# Altium PCB MainBoard2.PcbDoc
Units mil, origin at the board's own origin, x right, y up, seen from the top; angles counter-clockwise.
Board outline 3149.61 x 2351.58 mil, 2 copper layers (Top Layer, Bottom Layer); 16 components, 23 nets, 192 pads, 0 vias.
Unrouted connection lines stored in the file: 73.
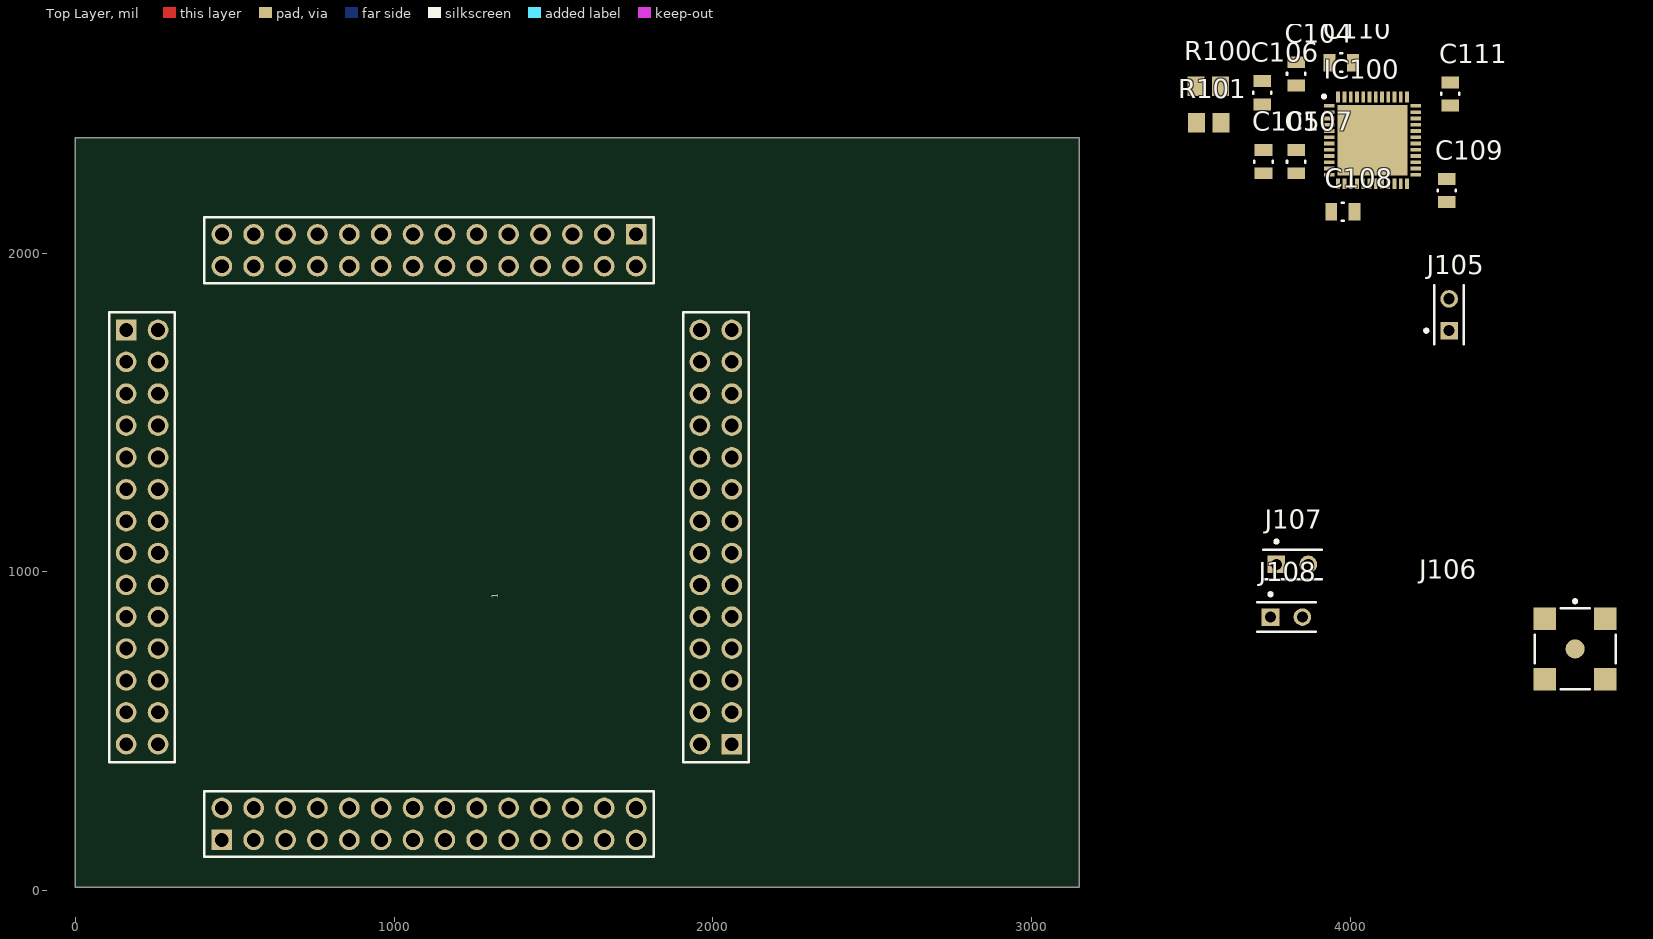
[diagram p0: Top Layer view]
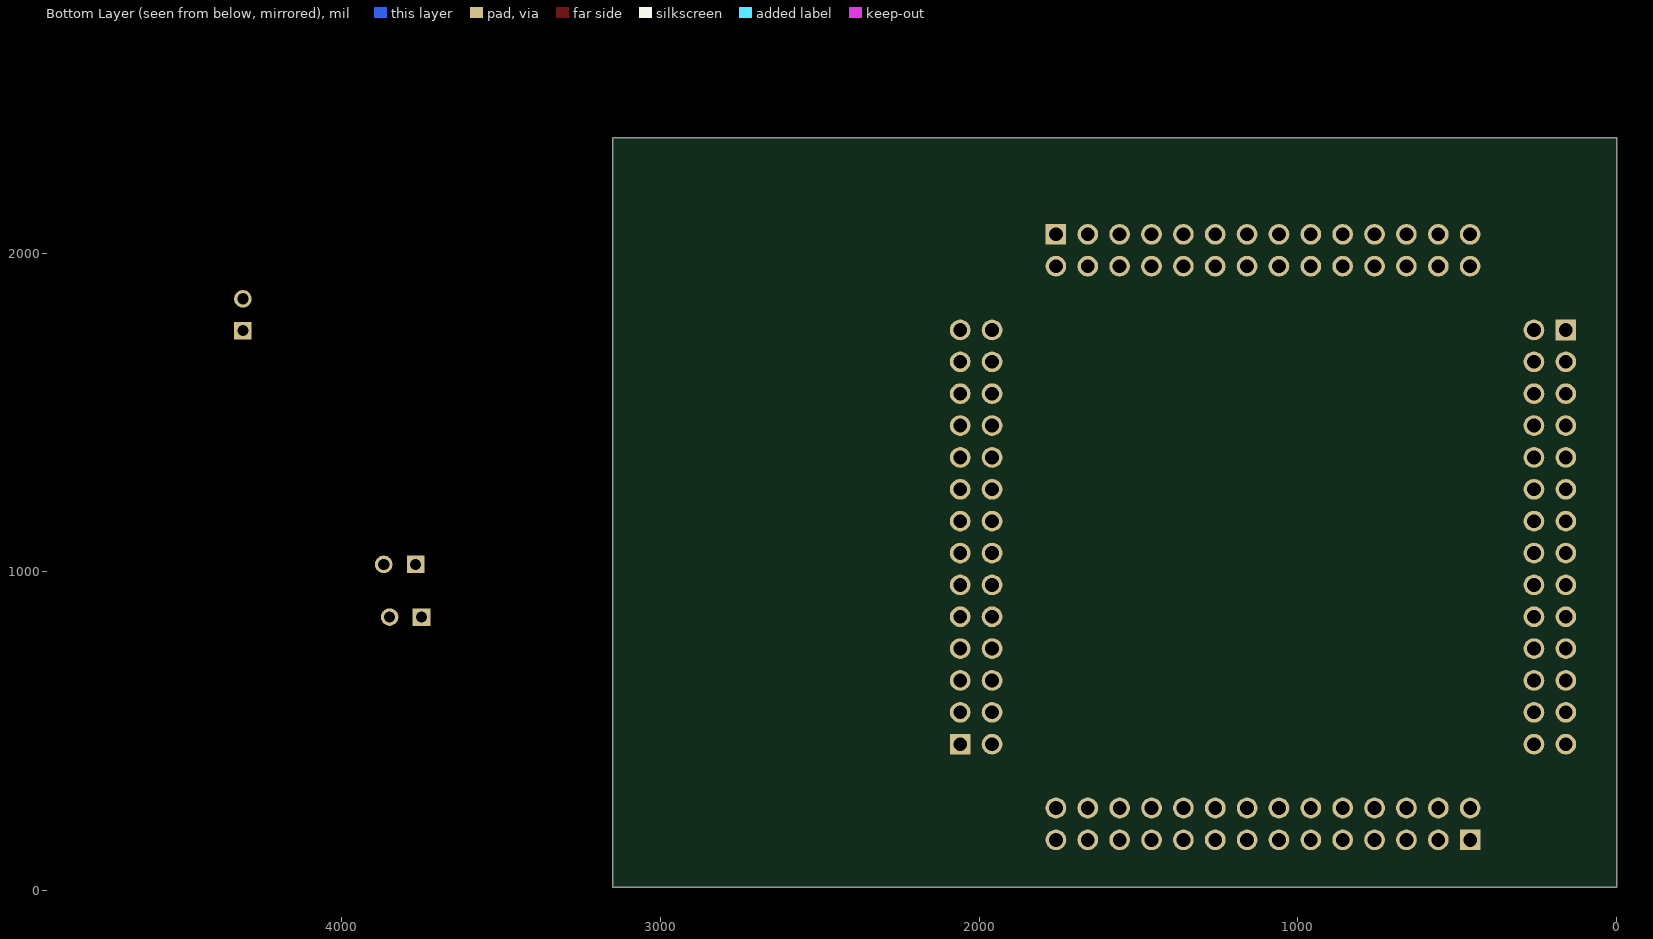
[diagram p1: Bottom Layer view, seen from below]

## Layer stack, top to bottom
Top Solder: solder mask 0.4, Solder Resist, Dk 3.5
Top Layer: signal copper 1.4
Dielectric 1: dielectric 12.6, FR-4, Dk 4.8
Bottom Layer: signal copper 1.4
Bottom Solder: solder mask 0.4, Solder Resist, Dk 3.5

## Board outline
0,10.62 3149.61,10.62 3149.61,2362.2 0,2362.2

## Design rules (kind name [scope] priority, off if disabled: settings)
Clearance [All] p1: gap=10 ignorepadtopadclearanceinfootprint=FALSE except(0: Arc-Hole Track-Hole SMDPad-Hole THPad-Hole Via-Hole Fill-Hole Poly-Hole Region-Hole Text-Hole)
PolygonConnect [All] p1: connectstyle=Relief reliefconductorwidth=10 reliefentries=4 polygonreliefangle="90 Angle" airgapwidth=10
RoomDefinition Computation [InComponentClass('Computation')] p1: confinementstyle=ConfineIn formatcopy=TRUE lockcomponents=FALSE outline 6045,-627.5 7780,-627.5 7780,1032.5 6045,1032.5
RoutingVias [All] p1: holewidth=28 width=50 viastyle="Through Hole" minholewidth=28 minwidth=50 maxholewidth=28 maxwidth=50
SolderMaskExpansion [All] p1: expansion=4 istentingtop=FALSE
Width [All] p1: maxlimit=10 minlimit=10 preferedwidth=10
30 further rules are at their usual default settings.

## Classes and differential pairs
net class BIT579: ADC_BIT_5 ADC_BIT_7 ADC_BIT_9
net class BIT468: 3V3 ADC_BIT_4 ADC_BIT_6 ADC_BIT_8 GND
net class BIT13: ADC_BIT_1 ADC_BIT_3 GND Net_17 Net_19
component class Computation: C104 C105 C106 C107 C108 C109 C110 C111 IC100 J105 J106 J107 R100 R101

## Components (designator, comment, footprint, x,y, rotation, side; value= is the part's Value field where it differs from the comment)
C104 "0.1uF" FP-CC0805-0_85-MFG 3830.71,2562.99 r270 top value="100 nF"
C105 "0.1uF" FP-CC0805-0_85-MFG 3728.35,2287.4 r270 top value="100 nF"
C106 "0.1uF" FP-CC0805-0_85-MFG 3724.41,2503.94 r270 top value="100 nF"
C107 "0.1uF" FP-CC0805-0_85-MFG 3830.71,2287.4 r270 top value="100 nF"
C108 "0.1uF" FP-CC0805-0_85-MFG 3977.36,2129.92 r0 top value="100 nF"
C109 "0.1uF" FP-CC0805-0_85-MFG 4303.15,2196.85 r270 top value="100 nF"
C110 "0.1uF" FP-CC0805-0_85-MFG 3972.44,2598.43 r180 top value="100 nF"
C111 "0.1uF" FP-CC0805-0_85-MFG 4314.96,2500 r90 top value="100 nF"
IC100 "MAX19516ETM+" QFN50P700X700X80-49N 4070.87,2354.33 r0 top
J105 "5-146280-2" TECO-5-146280-2_V 4311.02,1807.09 r90 top
J106 "73251-1350" FP-73251-1350-MFG 4706.3,758.27 r270 top
J107 "5-146280-2" TECO-5-146280-2_V 3818.9,1023.62 r0 top
J108 "5-146280-2" TECO-5-146280-2_V 3800.39,858.27 r0 top
R100 "1.5R" RESC2013X70X40ML20T20 3555.12,2523.62 r0 top
R101 "1.5R" RESC2013X70X40ML20T20 3556.1,2409.45 r0 top
? "FPGA_Shield_headers" FPGA_SHIELD_HEADER_FOOTPRINT 0,0 r0 top

## Footprints (in the part's own frame and the unit in brackets; to place one, negate y for a bottom-side part, rotate by r counter-clockwise, add the part's x,y. Pads: shape width x height; smd on the part's side, far side on the other; paste and mask are expansions set on the pad)
FP-73251-1350-MFG [mil]
  round 60 smd paste+0 mask+0: 1(0,0)
  rect 70x70 smd paste+0 mask+0: 2(-95,95) 3(95,95) 4(-95,-95) 5(95,-95)
  silkscreen extent -155,-127 127,127, body extent -134,-134 134,134, height 10
FP-CC0805-0_85-MFG [mm]
  rect 0.95x1.4 smd paste+0 mask+0: 1(-0.925,0) 2(0.925,0)
  silkscreen extent -0.08,-0.72 0.08,0.72, body extent -1.6,-1.05 1.6,1.05, height 0.25
FPGA_SHIELD_HEADER_FOOTPRINT [mm]
  rect 1.65x1.65 hole 1.1: 1(4.04,44.685) 56(44.689,52.311) 84(52.318,11.665) 85(11.666,4.04)
  round 1.65 hole 1.1: 2(6.58,44.685) 3(4.04,42.145) 4(6.58,42.145) 5(4.04,39.605) 6(6.58,39.605) 7(4.04,37.065) 8(6.58,37.065) 9(4.04,34.525) 10(6.58,34.525) 11(4.04,31.985) 12(6.58,31.985) 13(4.04,29.445) 14(6.58,29.445) 15(4.04,26.905) 16(6.58,26.905) 17(4.04,24.365) 18(6.58,24.365) 19(4.04,21.825) 20(6.58,21.825) 21(4.04,19.285) 22(6.58,19.285) 23(4.04,16.745) 24(6.58,16.745) 25(4.04,14.205) 26(6.58,14.205) 27(4.04,11.665) 28(6.58,11.665) 29(11.669,49.771) 30(11.669,52.311) 31(14.209,49.771) 32(14.209,52.311) 33(16.749,49.771) 34(16.749,52.311) 35(19.289,49.771) 36(19.289,52.311) 37(21.829,49.771) 38(21.829,52.311) 39(24.369,49.771) 40(24.369,52.311) 41(26.909,49.771) 42(26.909,52.311) 43(29.449,49.771) 44(29.449,52.311) 45(31.989,49.771) 46(31.989,52.311) 47(34.529,49.771) 48(34.529,52.311) 49(37.069,49.771) 50(37.069,52.311) 51(39.609,49.771) 52(39.609,52.311) 53(42.149,49.771) 54(42.149,52.311) 55(44.689,49.771) 57(49.778,44.685) 58(52.318,44.685) 59(49.778,42.145) 60(52.318,42.145) 61(49.778,39.605) 62(52.318,39.605) 63(49.778,37.065) 64(52.318,37.065) 65(49.778,34.525) 66(52.318,34.525) 67(49.778,31.985) 68(52.318,31.985) 69(49.778,29.445) 70(52.318,29.445) 71(49.778,26.905) 72(52.318,26.905) 73(49.778,24.365) 74(52.318,24.365) 75(49.778,21.825) 76(52.318,21.825) 77(49.778,19.285) 78(52.318,19.285) 79(49.778,16.745) 80(52.318,16.745) 81(49.778,14.205) 82(52.318,14.205) 83(49.778,11.665) 86(11.666,6.58) 87(14.206,4.04) 88(14.206,6.58) 89(16.746,4.04) 90(16.746,6.58) 91(19.286,4.04) 92(19.286,6.58) 93(21.826,4.04) 94(21.826,6.58) 95(24.366,4.04) 96(24.366,6.58) 97(26.906,4.04) 98(26.906,6.58) 99(29.446,4.04) 100(29.446,6.58) 101(31.986,4.04) 102(31.986,6.58) 103(34.526,4.04) 104(34.526,6.58) 105(37.066,4.04) 106(37.066,6.58) 107(39.606,4.04) 108(39.606,6.58) 109(42.146,4.04) 110(42.146,6.58) 111(44.686,4.04) 112(44.686,6.58)
  silkscreen extent 2.7,2.69 53.66,53.66, body extent 2.77,2.77 53.59,53.58, height 8.59
QFN50P700X700X80-49N [mm]
  rect 0.85x0.3 smd: 1(-3.45,2.75) 2(-3.45,2.25) 3(-3.45,1.75) 4(-3.45,1.25) 5(-3.45,0.75) 6(-3.45,0.25) 7(-3.45,-0.25) 8(-3.45,-0.75) 9(-3.45,-1.25) 10(-3.45,-1.75) 11(-3.45,-2.25) 12(-3.45,-2.75) 25(3.45,-2.75) 26(3.45,-2.25) 27(3.45,-1.75) 28(3.45,-1.25) 29(3.45,-0.75) 30(3.45,-0.25) 31(3.45,0.25) 32(3.45,0.75) 33(3.45,1.25) 34(3.45,1.75) 35(3.45,2.25) 36(3.45,2.75)
  rect 0.3x0.85 smd: 13(-2.75,-3.45) 14(-2.25,-3.45) 15(-1.75,-3.45) 16(-1.25,-3.45) 17(-0.75,-3.45) 18(-0.25,-3.45) 19(0.25,-3.45) 20(0.75,-3.45) 21(1.25,-3.45) 22(1.75,-3.45) 23(2.25,-3.45) 24(2.75,-3.45) 37(2.75,3.45) 38(2.25,3.45) 39(1.75,3.45) 40(1.25,3.45) 41(0.75,3.45) 42(0.25,3.45) 43(-0.25,3.45) 44(-0.75,3.45) 45(-1.25,3.45) 46(-1.75,3.45) 47(-2.25,3.45) 48(-2.75,3.45)
  rect 5.6x5.6 smd: 49(0,0)
  silkscreen extent -4,3.38 -3.75,3.62, body extent -3.55,-3.55 3.55,3.55, height 0.8
RESC2013X70X40ML20T20 [mm] "Chip Resistor, 2-Leads, Body 2.00x1.25mm, IPC Low Density"
  rect 1.35x1.55 smd: 1(-0.975,0) 2(0.975,0)
  body extent -1.1,-0.72 1.1,0.72, height 0.7
TECO-5-146280-2_V [mm] "Connector, 2-Leads, Body 4.67x2.34mm, Pitch 2.54mm"
  rect 1.4x1.4 hole 0.89: 1(-1.27,0)
  round 1.4 hole 0.89: 2(1.27,0)
  silkscreen extent -2.33,-1.17 2.33,1.94, body extent -2.34,-1.17 2.34,1.17, height 5.33

## Part data
C104 C105 C106 C107 C108 C109 C110 C111: library part CMP-1036-04410-2, "CAP CER 0.1UF 25V X7R 0805", Capacitance="100 nF", Manufacturer=Yageo, Manufacturer Part Number=CC0805KRX7R8BB104, Package=CC0805-0.85, Temperature="-30°C to +85°C", Temperature Characteristic=X7R, Temperature Range High=+85°C, Temperature Range Low=-30°C, Tolerance=0.1, Voltage Rating="25 V", Automotive=No, Category=Cap, ComponentLink2Description=Datasheet, ComponentLink2URL=http://www.yageo.com/documents/recent/UPY-GPHC_Y5V_6.3V-to-50V_8.pdf, Device Class L1="Passive Components", Device Class L2=Capacitors, Device Class L3="Ceramic Capacitors", Digikey Description="CAP CER 0.1UF 25V X7R 0805", Footprint Url=http://www.yageo.com/exep/pages/download/literatures/UPY-C_GEN_24.pdf, Height=0.95mm, Ipc Land Pattern Name=CAPC200125X85, Lead Free=Yes, Material=Ceramic, Mouser Description="Multilayer Ceramic Capacitors MLCC - SMD/SMT 100nF 25V X7R 10%", Octopart=https://octopart.com/cc0805krx7r8bb104-yageo-39467766, RoHS=TRUE
IC100: "Integrated Circuit", Manufacturer_Name="Maxim Integrated", Mouser Part Number=700-MAX19516ETM, Datasheet Link=https://datasheets.maximintegrated.com/en/ds/MAX19516.pdf, Height=0.8mm, Manufacturer_Part_Number=MAX19516ETM+, Mouser Price/Stock=https://www.mouser.co.uk/ProductDetail/Maxim-Integrated/MAX19516ETM%2b/?qs=1THa7WoU59FJ2JI%2FsSE3dA%3D%3D
J105 J107 J108: library part CMP-2000-07492-1, "Male Header, Pitch 2.54 mm, 1 x 2 Position, Height 8.21 mm, Tail Length 3.05 mm, -65 to 105 degC, RoHS, Bulk", Case\/Package=100, Colour=Black, Current Rating=3A, Flammability Rating=UL94V-0, High Temperature Housing=Yes, Manufacturer="TE Connectivity", Max Current Rating=5A, Max Operating Temperature=105degC, Min Operating Temperature=-65degC, Package Description="Male Header, Pitch 2.54 mm, 1 x 2 Position, Height 8.21 mm, Tail Length 3.05 mm", Package Quantity=500, Approvals=CSA, Board Standoff=No(Without), Connector Type=Header, Contact Gender=Male, Contact Material=CopperAlloy, Contact Mating Length=0.23inch, Contact Plating=Matte, Contact Protection=No(Without), Contact Shape=Square, Datasheet URL=http://www.te.com/commerce/DocumentDelivery/DDEController?Action=showdoc&DocId=Customer+Drawing%7F146280%7FH1%7Fpdf%7FEnglish%7FENG_CD_146280_H1.pdf%7F5-146280-2, Datasheet Version="Rev. H1, 08/2016", Depth=2.34mm, Gasket=No(Without), High Speed Serial Data Connector=No, Housing Colour=Black, Housing Material=Polymer, Keyed=No, Length=4.67mm, Manufacturer URL=http://www.te.com/, Mating Alignment=No(Without), Mating Connector Lock=No(Without), Mating Post Length=0.23inch, Mount=ThroughHole, Mounting Technology=ThroughHole, Number of Contacts=2, Number of Positions=2, Number of Rows=1, Orientation=Straight, Package Reference=5-146280-2, Packaging=Carton, Panel Mount Retention=No(Without), PCB Mount Retention=Without, PCB Mounting Orientation=Vertical, PCB Thickness=0.063inch, Pitch=2.54mm, Radiation Hardening=No, RoHSCompliant=true, Row Spacing=2.54mm, Selectively Loaded=No(Without), Stabilizers=No(Without), Termination=ThroughHole, Termination Post Length=0.12inch
J106: library part CMP-04764-000006-1, "CONN SMA JACK STR 50 OHM SMD", Frequency=18GHz, Manufacturer=Molex, Temperature="-65°C to +165°C", Temperature Range High=+165°C, Temperature Range Low=-65°C, Voltage Rating=500V, Automotive=No, Category=Conn, ComponentLink2Description=Datasheet, ComponentLink2URL=https://www.molex.com/pdm_docs/sd/732511350_sd.pdf, Conn Orientation=Straight, Contact Material=Gold, Device Class L1=Connectors, Device Class L2="RF / Coaxial Connectors", Device Class L3=unset, Digikey Description="CONN SMA JACK STR 50 OHM SMD", Footprint Url=https://forum.upverter.com/uploads/default/original/3X/d/a/daeafa2ce4908d4fc4e49f0b17d7d2c986fce444.pdf, Height=9.655mm, Impedance=50Ω, Is Female=yes, Lead Free=Yes, Manufacturer Part Number=73251-1350, Mouser Description="RF Connectors / Coaxial Connectors SMA ST PCB-JCK STD SMT", Number of Contacts=1, Octopart=https://octopart.com/73251-1350-molex-5414390, Package=73251-1350, RoHS=TRUE, Shielding=true, Standoff Height=0.41mm
R100 R101: library part CMP-2001-00490-1, Manufacturer=Panasonic, Part Number=ERJ6BQF1R5V

## Nets (pads, with @x,y where several pads share a name; then routed paths per layer and width w, separated by ;. In a path a pad name is that pad's centre, name@x,y a point inside that pad or via, vN(x,y) a via of type N, cw(c..) or ccw(c..) an arc to the next point about the centre after c; other vN are vias at no path point)
3V3: ?.27 ?.28 ?.29 ?.57 ?.111 ?.112 C108.1 C109.1 C110.2 C111.1 IC100.1 IC100.5 IC100.12 IC100.13 IC100.25 IC100.36 IC100.47 IC100.48
ADC_BIT_0: ?.22 IC100.32
ADC_BIT_1: ?.21 IC100.33
ADC_BIT_2: ?.24 IC100.34
ADC_BIT_3: ?.23 IC100.35
ADC_BIt_4: ?.86 IC100.37
ADC_BIT_5: ?.85 IC100.38
ADC_BIT_6: ?.88 IC100.39
ADC_BIT_7: ?.87 IC100.40
ADC_BIT_8: ?.90 IC100.41
ADC_BIT_9: ?.89 IC100.42
ADC_CLK: IC100.15
ADC_DCLK: IC100.44
ADC_DOR: IC100.43
ADC_IN_+: J105.2 J106.1 R100.1 R101.1
ADC_IN_-: C105.1 IC100.4
ADC_SYNC: IC100.14
GND: ?.1 ?.2 ?.8 ?.9 ?.10 ?.25 ?.26 ?.30 ?.31 ?.55 ?.56 ?.58 ?.59 ?.83 ?.84 ?.109 ?.110 C104.1 C105.2 C106.1 C107.2 C108.2 C109.2 C110.1 C111.2 IC100.7 IC100.16 IC100.17 IC100.18 IC100.45 IC100.46 IC100.49 J105.1 J106.2 J106.3 J106.4 J106.5 J108.1
NetC104_2: C104.2 IC100.2
NetC106_2: C106.2 IC100.3 R100.2 R101.2
NetC107_1: C107.1 IC100.6
UART_RX: J107.1
UART_TX: J107.2
pads on no net: ?.3 ?.4 ?.5 ?.6 ?.7 ?.11 ?.12 ?.13 ?.14 ?.15 ?.16 ?.17 ?.18 ?.19 ?.20 ?.32 ?.33 ?.34 ?.35 ?.36 ?.37 ?.38 ?.39 ?.40 ?.41 ?.42 ?.43 ?.44 ?.45 ?.46 ?.47 ?.48 ?.49 ?.50 ?.51 ?.52 ?.53 ?.54 ?.60 ?.61 ?.62 ?.63 ?.64 ?.65 ?.66 ?.67 ?.68 ?.69 ?.70 ?.71 ?.72 ?.73 ?.74 ?.75 ?.76 ?.77 ?.78 ?.79 ?.80 ?.81 ?.82 ?.91 ?.92 ?.93 ?.94 ?.95 ?.96 ?.97 ?.98 ?.99 ?.100 ?.101 ?.102 ?.103 ?.104 ?.105 ?.106 ?.107 ?.108 IC100.8 IC100.9 IC100.10 IC100.11 IC100.19 IC100.20 IC100.21 IC100.22 IC100.23 IC100.24 IC100.26 IC100.27 IC100.28 IC100.29 IC100.30 IC100.31 J108.2

## Text inside footprints (layer, text, board x,y; h text height)
?: Top Overlay "1" at 1325,915.2 h20 r90